# EAGLE board beehive_control_kit (EAGLE 7.6.0)

Size 73.58 x 114.19 mm. Coordinates in mm from the lower left corner, seen from the top.
Outline: 0,0 56.82,0 56.82,53.33 0,53.33 0,0
Copper layers (1*16): Top 0.035mm / dielectric 1.5mm / Bottom 0.035mm
Design rules "default": minimum track width 10mil, minimum drill 24mil, track to track 8mil, track to pad 8mil, pad to pad 8mil, via to via 8mil, smd to smd 8mil, copper to edge 40mil, drill to drill 8mil, minimum pad ring 10mil, minimum via ring 8mil, stop-mask expansion 4mil, vias tented up to drill 0mil, thermal gap 10mil

## Footprints (pad centres in the part's own frame; a part is rotated, then mirrored left to right if it is on the bottom)
LED5MM = drill 0.813 octagon: A -1.27,0; K 1.27,0
0207/10 = drill 0.813 octagon: 1 -5.08,0; 2 5.08,0
M251 = drill 0.813 long: 1 -2.54,0; 2 0,0; 3 2.54,0
ARDUINO_UNO = drill 1.016 pad 1.88: 0 63.5,50.8; 1 60.96,50.8; 2 58.42,50.8; 3 55.88,50.8; 3.3V 35.56,2.54; 4 53.34,50.8; 5 50.8,50.8; 5V 38.1,2.54; 6 48.26,50.8; 7 45.72,50.8; 8 41.656,50.8; 9 39.116,50.8; 10 36.576,50.8; 11 34.036,50.8; 12 31.496,50.8; 13 28.956,50.8; A0 50.8,2.54; A1 53.34,2.54; A2 55.88,2.54; A3 58.42,2.54; A4 60.96,2.54; A5 63.5,2.54; AREF 23.876,50.8; GND 26.416,50.8; GND. 43.18,2.54; GND.. 40.64,2.54; I/OREF 30.48,2.54; N/C 27.94,2.54; RESET 33.02,2.54; SCL 18.796,50.8; SDA 21.336,50.8; VIN 45.72,2.54 | hole 3.2: 66.04,7.62; 66.04,35.56; 15.24,50.8; 13.97,2.54
TO92 = drill 0.813 octagon: 1 1.27,0; 2 0,1.905; 3 -1.27,0

## Placement (x,y rotation side)
D1  [LED5MM]  5,98.98 0 top
D2  [LED5MM]  5,213.28 0 top  (outside the outline)
R1  10k‎Ω  [0207/10]  5,162.48 0 top  (outside the outline)
R2  100‎Ω  [0207/10]  5,111.68 0 top
R7  10k‎Ω  [0207/10]  5,175.18 0 top  (outside the outline)
R8  10k‎Ω  [0207/10]  5,187.88 0 top  (outside the outline)
R9  10k‎Ω  [0207/10]  5,200.58 0 top  (outside the outline)
R10  100‎Ω  [0207/10]  5,225.98 0 top  (outside the outline)
S1  [M251]  5,86.28 0 top
U1  [ARDUINO_UNO]  5,10.08 0 top
U2  [ARDUINO_UNO]  5,22.78 0 top
U3  [ARDUINO_UNO]  5,35.48 0 top
U4  [ARDUINO_UNO]  5,48.18 0 top
U5  [ARDUINO_UNO]  5,60.88 0 top
U6  [TO92]  5,73.58 0 top
U7  [TO92]  5,124.38 0 top  (outside the outline)
U8  [TO92]  5,137.08 0 top  (outside the outline)
U9  [TO92]  5,149.78 0 top  (outside the outline)

## Library data of the parts
D1 D2 R1 R2 R7-R10 S1 U1-U9 = AUTODESK_CIRCUITS_BREADBOARD

## Nets
N$1: R1.2 R7.2 R8.2 R9.2 U1.GND.. U2.GND.. U3.GND.. U4.GND.. U5.GND.. U6.1 U7.1 U8.1 U9.1
N$2: U1.A4 U2.A4 U3.A4 U4.A4 U5.A4
N$3: U1.A5 U2.A5 U3.A5 U4.A5 U5.A5
N$4: U3.5V U7.3
N$5: U4.5V U8.3
N$6: U5.5V U9.3
N$7: U2.A0 U6.2
N$8: U3.A0 U7.2
N$9: U4.A0 U8.2
N$10: U5.A0 U9.2
N$11: U2.5V U6.3
N$12: R1.1 U2.A1
N$13: R7.1 U3.A1
N$14: R8.1 U4.A1
N$15: R9.1 U5.A1
N$16: D1.A R2.2
N$17: R2.1 U1.13
N$18: S1.2 U1.12
N$19: S1.1 U1.5V
N$20: D1.K D2.K S1.3 U1.GND
N$21: D2.A R10.2
N$22: R10.1 U1.11

## Tracks (layer width: path | path; a pad name or v marks a point on that pad's centre or on a via)
N$1  (12 unrouted)
N$2  (4 unrouted)
N$3  (4 unrouted)
N$4  (1 unrouted)
N$5  (1 unrouted)
N$6  (1 unrouted)
N$7  (1 unrouted)
N$8  (1 unrouted)
N$9  (1 unrouted)
N$10  (1 unrouted)
N$11  (1 unrouted)
N$12  (1 unrouted)
N$13  (1 unrouted)
N$14  (1 unrouted)
N$15  (1 unrouted)
N$16  (1 unrouted)
N$17  (1 unrouted)
N$18  (1 unrouted)
N$19  (1 unrouted)
N$20  (3 unrouted)
N$21  (1 unrouted)
N$22  (1 unrouted)